# EAGLE board 4Bit Computer - 2 4Bit Input (EAGLE 7.6.0)
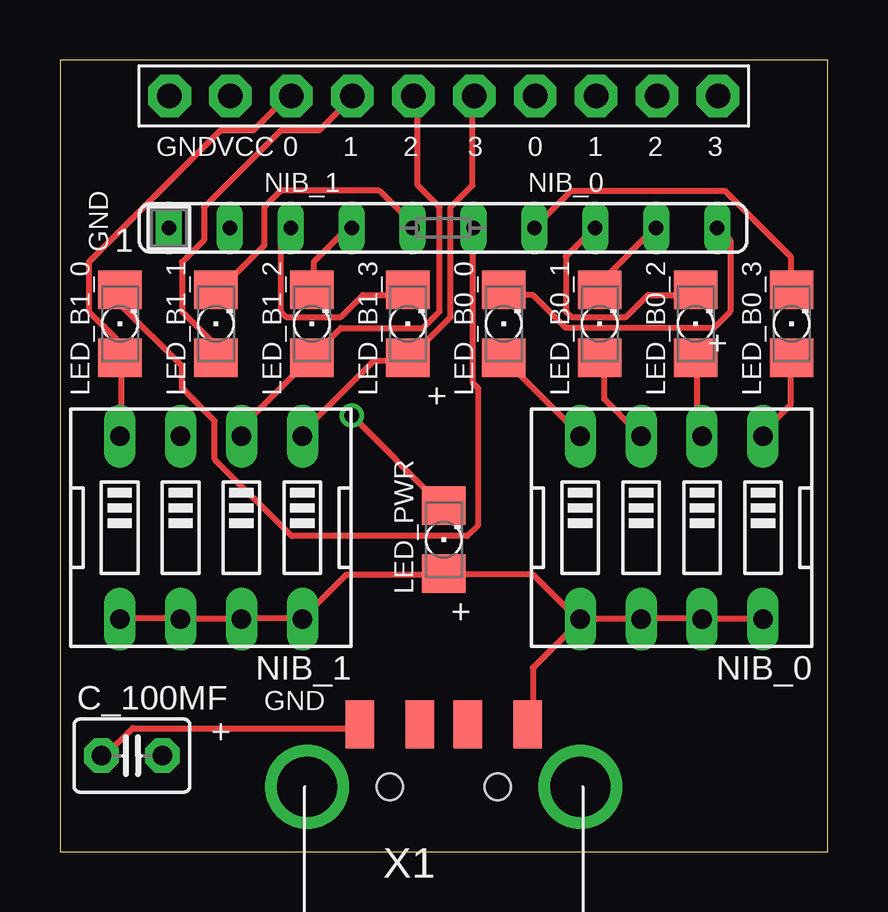
[diagram p0: board, top side]
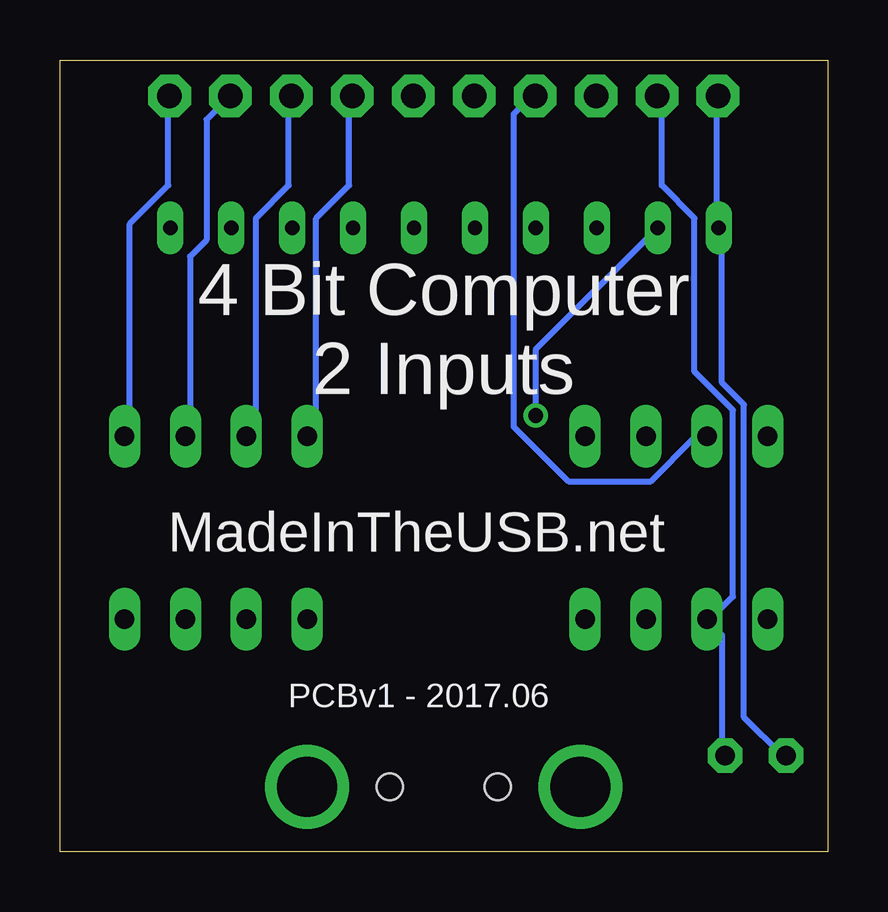
[diagram p1: board, bottom side, seen from below]

Size 32 x 33 mm. Coordinates in mm from the lower left corner, seen from the top.
Outline: 0,0 32,0 32,33 0,33 0,0
Copper layers (1*16): Top 0.035mm / dielectric 1.5mm / Bottom 0.035mm
Design rules "default": minimum track width 10mil, minimum drill 24mil, track to track 8mil, track to pad 8mil, pad to pad 8mil, via to via 8mil, smd to smd 8mil, copper to edge 40mil, drill to drill 8mil, minimum pad ring 10mil, minimum via ring 8mil, stop-mask expansion 4mil, vias tented up to drill 0mil, thermal gap 10mil

## Footprints (pad centres in the part's own frame; a part is rotated, then mirrored left to right if it is on the bottom)
1X10-BIG = drill 1.016 pad 1.778 octagon: 1 -11.43,0; 2 -8.89,0; 3 -6.35,0; 4 -3.81,0; 5 -1.27,0; 6 1.27,0; 7 3.81,0; 8 6.35,0; 9 8.89,0; 10 11.43,0
C025-030X050 = drill 0.813 pad 1.422 octagon: 1 -1.27,0; 2 1.27,0
1206 = smd 1.6 x 1.803: A -1.422,0; C 1.422,0
EDG-04 = drill 0.813 long: 1 -3.81,-3.81; 2 -1.27,-3.81; 3 1.27,-3.81; 4 3.81,-3.81; 5 3.81,3.81; 6 1.27,3.81; 7 -1.27,3.81; 8 -3.81,3.81
SIP10 = drill 0.6 long: 1 -11.46,0; 2 -8.92,0; 3 -6.38,0; 4 -3.84,0; 5 -1.3,0; 6 1.24,0; 7 3.78,0; 8 6.32,0; 9 8.86,0; 10 11.4,0
MOLEX_480371000 = smd 1.2 x 2: 1 3.5,2.6; 2 1,2.6; 3 -1,2.6; 4 -3.5,2.6 | drill 2.5: M1 -5.7,0; M2 5.7,0 | hole 1.1: -2.25,0; 2.25,0

## Placement (x,y rotation side)
BITS_OUT  PINHD-1X10  [1X10-BIG]  16,31.5 180 top
C_100MF  [C025-030X050]  3,4 0 top
LED_B0_0  [1206]  18.5,22 90 top
LED_B0_1  [1206]  22.5,22 90 top
LED_B0_2  [1206]  26.5,22 90 top
LED_B0_3  [1206]  30.5,22 90 top
LED_B1_0  [1206]  2.5,22 90 top
LED_B1_1  [1206]  6.5,22 90 top
LED_B1_2  [1206]  10.5,22 90 top
LED_B1_3  [1206]  14.5,22 90 top
LED_PWR  [1206]  16,13 90 top
NIB_0  [EDG-04]  25.5,13.5 180 top
NIB_1  [EDG-04]  6.3,13.5 180 top
RA  [SIP10]  16,26 0 top
X1  USB-A  [MOLEX_480371000]  16,2.7 0 top

## Library data of the parts
BITS_OUT C_100MF LED_B0_0 LED_B0_1-LED_B0_3 LED_B1_0 LED_B1_1-LED_B1_3 LED_PWR X1 = adafruit
NIB_0 NIB_1 = special
RA = resistor-sip

## Nets
B0_IN_0: BITS_OUT.4 LED_B0_0.A NIB_0.4
B0_IN_1: BITS_OUT.3 LED_B0_1.A NIB_0.3
B0_IN_2: BITS_OUT.2 LED_B0_2.A NIB_0.2
B0_IN_3: BITS_OUT.1 LED_B0_3.A NIB_0.1
B1_IN_0: BITS_OUT.8 LED_B1_0.A NIB_1.4
B1_IN_1: BITS_OUT.7 LED_B1_1.A NIB_1.3
B1_IN_2: BITS_OUT.6 LED_B1_2.A NIB_1.2
B1_IN_3: BITS_OUT.5 LED_B1_3.A NIB_1.1
GND: BITS_OUT.10 C_100MF.1 RA.1 X1.4
N$1: LED_B0_0.C RA.10
N$2: LED_B0_1.C RA.9
N$3: LED_B0_2.C RA.8
N$4: LED_B0_3.C RA.7
N$5: LED_B1_0.C RA.6
N$6: LED_B1_1.C RA.5
N$7: LED_B1_2.C RA.4
N$8: LED_B1_3.C RA.3
N$10: LED_PWR.C RA.2
VCC: BITS_OUT.9 C_100MF.2 LED_PWR.A NIB_0.5 NIB_0.6 NIB_0.7 NIB_0.8 NIB_1.5 NIB_1.6 NIB_1.7 NIB_1.8 X1.1

## Tracks (layer width: path | path; a pad name or v marks a point on that pad's centre or on a via)
B0_IN_0
  Top 0.254: LED_B0_0.A 18.57,20.46 21.55,17.49 NIB_0.4
  Bottom 0.254: BITS_OUT.4 19.95,31.43 19.95,27.78 21.32,26.41 21.32,17.72 21.55,17.49 NIB_0.4
B0_IN_1
  Top 0.254: LED_B0_1.A 22.69,20.46 22.69,18.86 24.06,17.49 NIB_0.3
  Bottom 0.254: BITS_OUT.3 22.46,31.43 22.46,27.78 23.83,26.41 23.83,17.72 24.06,17.49 NIB_0.3
B0_IN_2
  Top 0.254: LED_B0_2.A 26.57,20.46 26.57,17.49 NIB_0.2
  Bottom 0.254: NIB_0.2 26.57,17.49 26.57,24.8 25.89,25.49 25.89,30.52 24.98,31.43 BITS_OUT.2
B0_IN_3
  Top 0.254: LED_B0_3.A 30.46,20.46 30.46,18.63 29.32,17.49 NIB_0.1
  Bottom 0.254: BITS_OUT.1 27.49,31.43 27.49,27.78 29.09,26.18 29.09,17.49 NIB_0.1
B1_IN_0
  Top 0.254: NIB_1.4 2.57,17.49 2.57,20.46 LED_B1_0.A 2.34,20.69 2.34,21.38 1.2,22.52 1.2,24.58 6.69,30.06 8.06,30.06 9.43,31.43 BITS_OUT.8
B1_IN_1
  Top 0.254: LED_B1_1.A 6.46,20.69 6.46,21.15 5.09,22.52 5.09,24.58 6,25.49 6,26.86 9.2,30.06 10.8,30.06 12.17,31.43 BITS_OUT.7
  Bottom 0.254: NIB_1.3 5.09,17.26 5.54,17.26 7.37,15.43 10.8,15.43 13.09,17.72 13.09,30.75 12.4,31.43 BITS_OUT.7
B1_IN_2
  Top 0.254: NIB_1.2 7.37,17.49 10.34,20.46 LED_B1_2.A 10.57,20.69 11.72,21.83 15.14,21.83 15.83,22.52 15.83,26.86 14.92,27.78 14.92,31.43 BITS_OUT.6
B1_IN_3
  Top 0.254: NIB_1.1 10.12,17.49 13.09,20.46 14.46,20.46 LED_B1_3.A 14.69,20.69 16.29,22.29 16.29,26.86 17.2,27.78 17.2,31.43 BITS_OUT.5
GND
  Top 0.254: X1.4 12.4,5.14 3.03,5.14 1.89,4 C_100MF.1
  Bottom 0.254: BITS_OUT.10 4.63,31.43 4.63,26.18 RA.1 4.4,25.95 4.4,19.55 3.49,18.63 3.49,5.6 1.89,4 C_100MF.1
N$1
  Top 0.254: LED_B0_0.C 18.57,23.2 19.72,23.2 21.09,21.83 27.26,21.83 27.95,22.52 27.95,25.49 27.49,25.95 RA.10
N$2
  Top 0.254: LED_B0_1.C 22.69,23.43 22.69,23.89 24.75,25.95 RA.9
N$3
  Top 0.254: LED_B0_2.C 26.35,23.2 24.52,23.2 23.6,22.29 21.32,22.29 21.09,22.52 21.09,24.8 22.23,25.95 RA.8
N$4
  Top 0.254: LED_B0_3.C 30.46,23.43 30.46,24.8 27.72,27.55 21.32,27.55 19.95,26.18 RA.7
N$5
  Top 0.254: LED_B1_0.C 2.57,23.2 2.57,22.75 5.09,20.23 5.09,19.32 6.46,17.95 6.46,16.35 9.66,13.15 16.97,13.15 17.43,13.6 17.43,19.32 17.2,19.55 17.2,25.95 RA.6
N$6
  Top 0.254: LED_B1_1.C 6.69,23.43 8.52,25.26 8.52,26.86 9.2,27.55 13.32,27.55 14.69,26.18 RA.5
N$7
  Top 0.254: LED_B1_2.C 10.57,23.43 10.57,24.58 11.95,25.95 RA.4
N$8
  Top 0.254: LED_B1_3.C 14.46,23.2 12.63,23.2 11.72,22.29 9.43,22.29 9.2,22.52 9.2,25.72 9.43,25.95 RA.3
N$10  (via drill 0.61)
  Top 0.254: v12.17,18.18 15.83,14.52 LED_PWR.C
  Bottom 0.254: v12.17,18.18 12.17,20.92 7.14,25.95 RA.2
VCC
  Top 0.254: NIB_0.8 29.09,9.72 26.8,9.72 NIB_0.7 26.57,9.72 24.29,9.72 NIB_0.6 24.06,9.72 21.77,9.72 NIB_0.5 | NIB_0.5 21.55,9.72 19.72,11.55 16.06,11.55 LED_PWR.A 15.83,11.55 11.95,11.55 10.12,9.72 NIB_1.8 9.89,9.72 7.6,9.72 NIB_1.7 7.37,9.72 5.09,9.72 NIB_1.6 4.86,9.72 2.57,9.72 NIB_1.5 | X1.1 19.72,5.37 19.72,7.66 21.55,9.49 NIB_0.5
  Bottom 0.254: C_100MF.2 4.4,4 4.4,9.03 4.86,9.49 NIB_1.6 4.86,9.72 3.94,10.63 3.94,18.4 5.54,20 5.54,26.41 6.91,27.78 6.91,31.43 BITS_OUT.9

## Text on the board
tNames: GND | VCC | 0 | 1 | 2 | 3 | 0 | 1 | 2 | 3 | NIB_1 | NIB_0 | GND | + | + | + | GND | +
bNames: 4 Bit Computer / 2 Inputs | MadeInTheUSB.net | PCBv1 - 2017.06